# Altium PCB Inverter.PcbDoc
Units mm, origin at the board's own origin, x right, y up, seen from the top; angles counter-clockwise.
Board outline 152.4 x 101.6 mm, 2 copper layers (Top Layer, Bottom Layer); 61 components, 47 nets, 212 pads, 0 vias.
Unrouted connection lines stored in the file: 107.
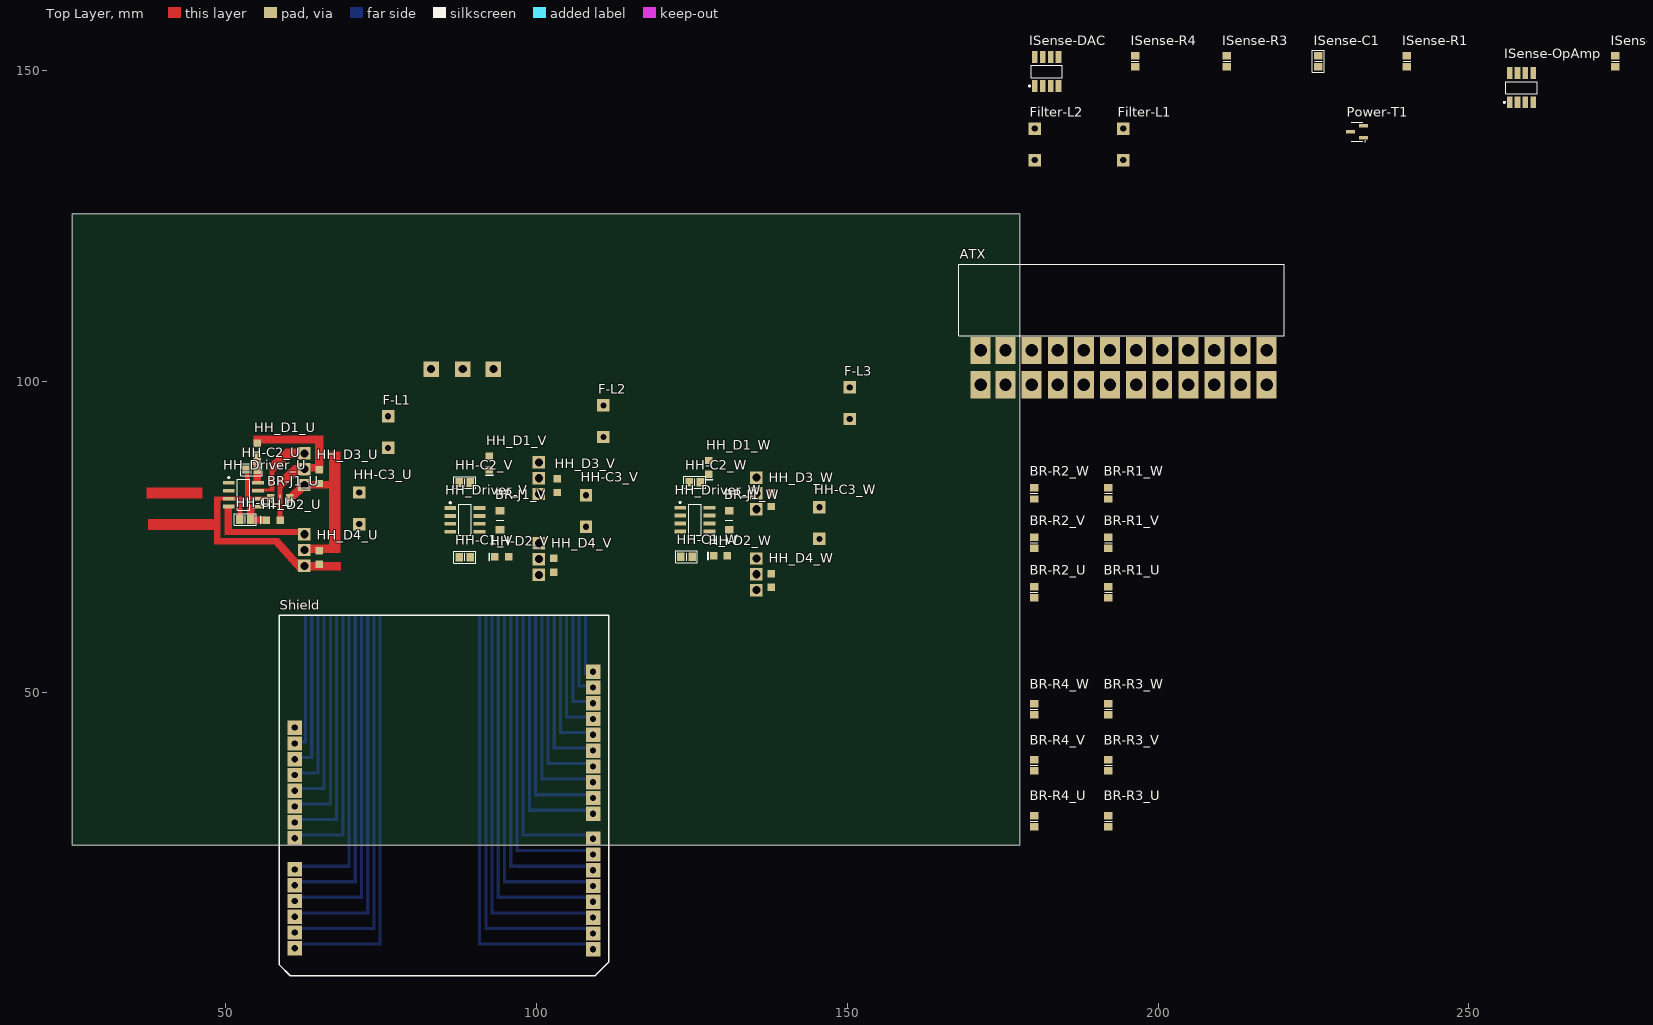
[diagram p0: Top Layer view]
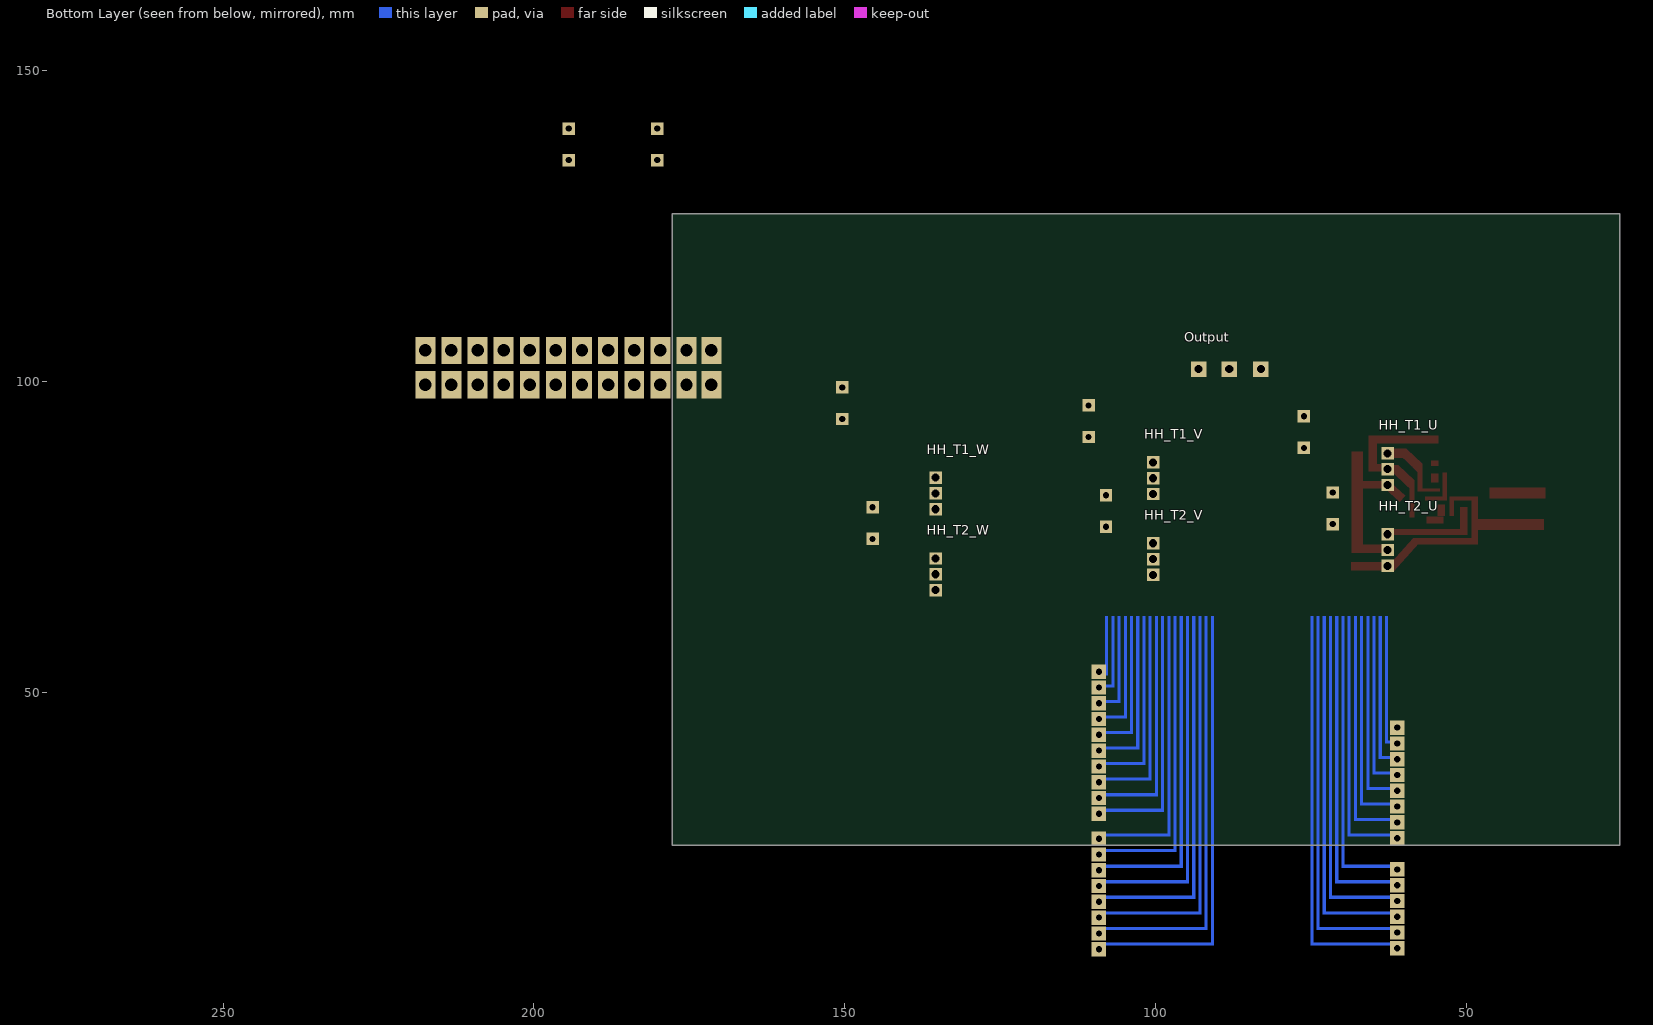
[diagram p1: Bottom Layer view, seen from below]

## Layer stack, top to bottom
Top Solder: solder mask 0.0102, Solder Resist, Dk 3.5
Top Layer: signal copper 0.0356
Dielectric 1: dielectric 0.32, FR-4, Dk 4.8
Bottom Layer: signal copper 0.0356
Bottom Solder: solder mask 0.0102, Solder Resist, Dk 3.5

## Board outline
25.4,25.4 177.8,25.4 177.8,127 25.4,127

## Design rules (kind name [scope] priority, off if disabled: settings)
Clearance [All] p1: gap=0.254
PolygonConnect [All] p1: connectstyle=Relief reliefconductorwidth=0.254 reliefentries=4 polygonreliefangle="90 Angle" airgapwidth=0.254
RoutingVias [All] p1: holewidth=0.711 width=1.27 viastyle="Through Hole" minholewidth=0.711 minwidth=1.27 maxholewidth=0.711 maxwidth=1.27
SolderMaskExpansion [All] p1: expansion=0.102
Width [All] p1: maxlimit=0.254 minlimit=0.254 preferedwidth=0.254
30 further rules are at their usual default settings.

## Classes and differential pairs
component class ISense: ISense-C1 ISense-DAC ISense-OpAmp ISense-R1 ISense-R2 ISense-R3 ISense-R4
component class ATX: ATX Filter-L1 Filter-L2 HV-PWM-T Power-T1
component class "Arduino Uno Connector": Shield
channel class Bridge: U V W
component class "Output Filter": F-L1 F-L2 F-L3
component class U: BR-J1_U BR-R1_U BR-R2_U BR-R3_U BR-R4_U HH-C1_U HH-C2_U HH-C3_U HH-D2_U HH_D1_U HH_D3_U HH_D4_U HH_Driver_U HH_T1_U HH_T2_U
component class V: BR-J1_V BR-R1_V BR-R2_V BR-R3_V BR-R4_V HH-C1_V HH-C2_V HH-C3_V HH-D2_V HH_D1_V HH_D3_V HH_D4_V HH_Driver_V HH_T1_V HH_T2_V
component class W: BR-J1_W BR-R1_W BR-R2_W BR-R3_W BR-R4_W HH-C1_W HH-C2_W HH-C3_W HH-D2_W HH_D1_W HH_D3_W HH_D4_W HH_Driver_W HH_T1_W HH_T2_W
component class Top: Output

## Components (designator, comment, footprint, x,y, rotation, side; value= is the part's Value field where it differs from the comment)
ATX "ATX sorted" ATX 217.475,105 r180 top
BR-J1_U "0R" "R 0805 / 2012 wide" 58.8,81.2 r0 top (schematic designator BR-J1)
BR-J1_V "0R" "R 0805 / 2012 wide" 94.175,77.675 r90 top (schematic designator BR-J1)
BR-J1_W "0R" "R 0805 / 2012 wide" 131.025,77.675 r90 top (schematic designator BR-J1)
BR-R1_U "10K" "R 0805 / 2012" 192.009,66.128 r90 top (schematic designator BR-R1)
BR-R1_V "10K" "R 0805 / 2012" 192.009,74.054 r90 top (schematic designator BR-R1)
BR-R1_W "10K" "R 0805 / 2012" 192.009,82.004 r90 top (schematic designator BR-R1)
BR-R2_U "10K" "R 0805 / 2012" 180.084,66.128 r90 top (schematic designator BR-R2)
BR-R2_V "10K" "R 0805 / 2012" 180.084,74.054 r90 top (schematic designator BR-R2)
BR-R2_W "10K" "R 0805 / 2012" 180.084,82.004 r90 top (schematic designator BR-R2)
BR-R3_U "33R" "R 0805 / 2012" 192.009,29.301 r90 top (schematic designator BR-R3)
BR-R3_V "33R" "R 0805 / 2012" 192.009,38.277 r90 top (schematic designator BR-R3)
BR-R3_W "33R" "R 0805 / 2012" 192.009,47.277 r90 top (schematic designator BR-R3)
BR-R4_U "33R" "R 0805 / 2012" 180.084,29.301 r90 top (schematic designator BR-R4)
BR-R4_V "33R" "R 0805 / 2012" 180.084,38.277 r90 top (schematic designator BR-R4)
BR-R4_W "33R" "R 0805 / 2012" 180.084,47.277 r90 top (schematic designator BR-R4)
F-L1 "10uH" "Header 1x2+1 1.0mm" 76.175,89.325 r90 top
F-L2 "10uH" "Header 1x2+1 1.0mm" 110.8,91.075 r90 top
F-L3 "10uH" "Header 1x2+1 1.0mm" 150.425,93.975 r90 top
Filter-L1 "10uH" "Header 1x2+1 1.0mm" 194.409,135.607 r90 top
Filter-L2 "10uH" "Header 1x2+1 1.0mm" 180.184,135.607 r90 top
HH-C1_U "10uF" "C 0805 / 2012" 53.2,77.8 r180 top (schematic designator HH-C1)
HH-C1_V "10uF" "C 0805 / 2012" 88.525,71.75 r180 top (schematic designator HH-C1)
HH-C1_W "10uF" "C 0805 / 2012" 124.175,71.8 r180 top (schematic designator HH-C1)
HH-C2_U "10uF" "C 0805 / 2012" 54.2,85.8 r180 top (schematic designator HH-C2)
HH-C2_V "10uF" "C 0805 / 2012" 88.525,83.75 r180 top (schematic designator HH-C2)
HH-C2_W "10uF" "C 0805 / 2012" 125.5,83.8 r180 top (schematic designator HH-C2)
HH-C3_U "10uF" "Header 1x2+1 1.0mm" 71.525,82.15 r270 top (schematic designator HH-C3)
HH-C3_V "10uF" "Header 1x2+1 1.0mm" 108,81.725 r270 top (schematic designator HH-C3)
HH-C3_W "10uF" "Header 1x2+1 1.0mm" 145.55,79.775 r270 top (schematic designator HH-C3)
HH-D2_U "SK14" SC-90 57.7,77.7 r180 top (schematic designator HH-D2)
HH-D2_V "SK14" SC-90 94.45,71.8 r180 top (schematic designator HH-D2)
HH-D2_W "SK14" SC-90 129.625,71.95 r180 top (schematic designator HH-D2)
HH_D1_U "SK14" SC-90 55.125,89 r270 top (schematic designator HH_D1)
HH_D1_V "SK14" SC-90 92.475,86.9 r270 top (schematic designator HH_D1)
HH_D1_W "SK14" SC-90 127.8,86.2 r270 top (schematic designator HH_D1)
HH_D3_U "SK14" SC-90 65.1,84.7 r90 top (schematic designator HH_D3)
HH_D3_V "SK14" SC-90 103.375,83.25 r90 top (schematic designator HH_D3)
HH_D3_W "SK14" SC-90 137.8,81 r90 top (schematic designator HH_D3)
HH_D4_U "SK14" SC-90 65.1,71.7 r90 top (schematic designator HH_D4)
HH_D4_V "SK14" SC-90 102.825,70.45 r90 top (schematic designator HH_D4)
HH_D4_W "SK14" SC-90 137.8,68 r90 top (schematic designator HH_D4)
HH_Driver_U "IR2101S" SOIC-8#1 52.9,81.8 r0 top (schematic designator HH_Driver)
HH_Driver_V "IR2101S" SOIC-8#1 88.525,77.75 r0 top (schematic designator HH_Driver)
HH_Driver_W "IR2101S" SOIC-8#1 125.5,77.8 r0 top (schematic designator HH_Driver)
HH_T1_U "BUZ21" "TO-220 AB" 62.7,85.9 r270 bottom (schematic designator HH_T1)
HH_T1_V "BUZ21" "TO-220 AB" 100.425,84.45 r270 bottom (schematic designator HH_T1)
HH_T1_W "BUZ21" "TO-220 AB" 135.4,82 r270 bottom (schematic designator HH_T1)
HH_T2_U "BUZ21" "TO-220 AB" 62.7,72.9 r270 bottom (schematic designator HH_T2)
HH_T2_V "BUZ21" "TO-220 AB" 100.425,71.45 r270 bottom (schematic designator HH_T2)
HH_T2_W "BUZ21" "TO-220 AB" 135.4,69 r270 bottom (schematic designator HH_T2)
ISense-C1 "100nF" "C 0805 / 2012" 225.786,151.507 r90 top
ISense-DAC "TC1321" SOIC-8#2 182.084,149.857 r90 top
ISense-OpAmp "LM258" SOIC-8#2 258.45,147.25 r90 top
ISense-R1 "0.47R" "R 0805 / 2012" 240.012,151.507 r90 top
ISense-R2 "10k" "R 0805 / 2012" 273.538,151.507 r90 top
ISense-R3 "10k" "R 0805 / 2012" 211.06,151.507 r90 top
ISense-R4 "10k" "R 0805 / 2012" 196.335,151.507 r90 top
Output "Screw terminals" DG301-5.0-03 83.1,102 r0 bottom
Power-T1 "2N7000" SOT-23-3 231.986,140.157 r90 top
Shield "Arduino Uno" "Arduino Uno Adapter" 85.15,34.8 r270 top

## Footprints (in the part's own frame and the unit in brackets; to place one, negate y for a bottom-side part, rotate by r counter-clockwise, add the part's x,y. Pads: shape width x height; smd on the part's side, far side on the other; paste and mask are expansions set on the pad)
"Arduino Uno Adapter" [mm]
  rect 2.3x2.3 hole 1: 0(26.1,24) 1(23.56,24) 2(21.02,24) 3(18.48,24) 3V3(-1.92,-24) 4(15.94,24) 5(13.4,24) 5V(0.62,-24) 6(10.86,24) 7(8.32,24) 8(4.32,24) 9(1.78,24) 10(-0.76,24) 11(-3.3,24) 12(-5.84,24) 13(-8.38,24) A0(13.26,-24) A1(15.8,-24) A2(18.34,-24) A3(20.88,-24) A4(23.42,-24) A5(25.96,-24) AREF(-13.46,24) GND1(3.16,-24) GND2(5.7,-24) GND3(-10.92,24) IOREF(-7,-24) NC(-9.54,-24) RESET(-4.46,-24) SCL(-18.54,24) SDA(-16,24) Vin(8.24,-24)
  Bottom Layer region: 10,11.5 10.5,11.5 10.5,24 10,24
  Bottom Layer region: 12.5,10.5 13,10.5 13,24 12.5,24
  Bottom Layer region: 15,9.5 15.5,9.5 15.5,24 15,24
  Bottom Layer region: 17.5,8.5 18,8.5 18,24 17.5,24
  Bottom Layer region: 20,7.5 20.5,7.5 20.5,24 20,24
  Bottom Layer region: 22.5,6.5 23,6.5 23,24 22.5,24
  Bottom Layer region: 25,5.5 25.5,5.5 25.5,24 25,24
  Bottom Layer region: 25,-24 25.5,-24 25.5,-10 25,-10
  Bottom Layer region: 22.5,-24 23,-24 23,-11 22.5,-11
  Bottom Layer region: 20,-24 20.5,-24 20.5,-12 20,-12
  Bottom Layer region: -7.5,-23.5 -7,-23.5 -7,-22 -7.5,-22
  Bottom Layer region: -27.5,-22.5 -7,-22.5 -7,-22 -27.5,-22
  Bottom Layer region: -27.5,-21.5 -4.5,-21.5 -4.5,-21 -27.5,-21
  Bottom Layer region: -27.5,-20.5 -2,-20.5 -2,-20 -27.5,-20
  Bottom Layer region: -27.5,-19.5 0.5,-19.5 0.5,-19 -27.5,-19
  Bottom Layer region: -27.5,-18.5 3,-18.5 3,-18 -27.5,-18
  Bottom Layer region: -27.5,-17.5 5.5,-17.5 5.5,-17 -27.5,-17
  Bottom Layer region: -27.5,-16.5 8,-16.5 8,-16 -27.5,-16
  Bottom Layer region: -27.5,-15.5 13,-15.5 13,-15 -27.5,-15
  Bottom Layer region: -27.5,-14.5 15.5,-14.5 15.5,-14 -27.5,-14
  Bottom Layer region: -27.5,-13.5 18,-13.5 18,-13 -27.5,-13
  Bottom Layer region: -27.5,-12.5 20.5,-12.5 20.5,-12 -27.5,-12
  Bottom Layer region: -27.5,-11.5 23,-11.5 23,-11 -27.5,-11
  Bottom Layer region: -27.5,-10.5 25.5,-10.5 25.5,-10 -27.5,-10
  Bottom Layer region: -5,-23.5 -4.5,-23.5 -4.5,-21 -5,-21
  Bottom Layer region: -2.5,-23.5 -2,-23.5 -2,-20 -2.5,-20
  Bottom Layer region: 0,-23.5 0.5,-23.5 0.5,-19 0,-19
  Bottom Layer region: 2.5,-23.5 3,-23.5 3,-18 2.5,-18
  Bottom Layer region: 5,-23.5 5.5,-23.5 5.5,-17 5,-17
  Bottom Layer region: 7.5,-23.5 8,-23.5 8,-16 7.5,-16
  Bottom Layer region: 12.5,-23.5 13,-23.5 13,-15 12.5,-15
  Bottom Layer region: 15,-23.5 15.5,-23.5 15.5,-14 15,-14
  Bottom Layer region: 17.5,-23.5 18,-23.5 18,-13 17.5,-13
  Bottom Layer region: 7.5,12.5 8,12.5 8,24 7.5,24
  Bottom Layer region: 3.5,13.5 4,13.5 4,24 3.5,24
  Bottom Layer region: 1,14.5 1.5,14.5 1.5,24 1,24
  Bottom Layer region: -1.5,15.5 -1,15.5 -1,24 -1.5,24
  Bottom Layer region: -4,16.5 -3.5,16.5 -3.5,24 -4,24
  Bottom Layer region: -6.5,17.5 -6,17.5 -6,24 -6.5,24
  Bottom Layer region: -9,18.5 -8.5,18.5 -8.5,24 -9,24
  Bottom Layer region: -11.5,19.5 -11,19.5 -11,24 -11.5,24
  Bottom Layer region: -14,20.5 -13.5,20.5 -13.5,24 -14,24
  Bottom Layer region: -27.5,9.5 15.5,9.5 15.5,10 -27.5,10
  Bottom Layer region: -27.5,8.5 18,8.5 18,9 -27.5,9
  Bottom Layer region: -27.5,7.5 20.5,7.5 20.5,8 -27.5,8
  Bottom Layer region: -27.5,6.5 23,6.5 23,7 -27.5,7
  Bottom Layer region: -27.5,5.5 25.5,5.5 25.5,6 -27.5,6
  Bottom Layer region: -27.5,10.5 13,10.5 13,11 -27.5,11
  Bottom Layer region: -27.5,11.5 10.5,11.5 10.5,12 -27.5,12
  Bottom Layer region: -27.5,12.5 8,12.5 8,13 -27.5,13
  Bottom Layer region: -27.5,13.5 4,13.5 4,14 -27.5,14
  Bottom Layer region: -27.5,14.5 1.5,14.5 1.5,15 -27.5,15
  Bottom Layer region: -27.5,15.5 -1,15.5 -1,16 -27.5,16
  Bottom Layer region: -27.5,16.5 -3.5,16.5 -3.5,17 -27.5,17
  Bottom Layer region: -27.5,17.5 -6,17.5 -6,18 -27.5,18
  Bottom Layer region: -27.5,18.5 -8.5,18.5 -8.5,19 -27.5,19
  Bottom Layer region: -27.5,19.5 -11,19.5 -11,20 -27.5,20
  Bottom Layer region: -27.5,20.5 -13.5,20.5 -13.5,21 -27.5,21
  Bottom Layer region: -27.5,22.5 -17.9,22.5 -17.9,23 -27.5,23
  Bottom Layer region: -27.5,21.5 -16,21.5 -16,22 -27.5,22
  Bottom Layer region: -16.5,21.5 -16,21.5 -16,24 -16.5,24
  silkscreen extent -27.64,-26.5 30.36,26.5
ATX [mm] "Molex MINI-FIT JR. 24-polig"
  rect 3.2x4.4 hole 2 paste+0: 1(46,0) 2(42,0) 3(37.8,0) 4(33.6,0) 5(29.4,0) 6(25.2,0) 7(21,0) 8(16.8,0) 9(12.6,0) 10(8.4,0) 11(4.2,0) 12(0,0) 13(46,5.5) 14(42,5.5) 15(37.8,5.5) 16(33.6,5.5) 17(29.4,5.5) 18(25.2,5.5) 19(21,5.5) 20(16.8,5.5) 21(12.6,5.5) 22(8.4,5.5) 23(4.2,5.5) 24(0,5.5)
  silkscreen extent -2.79,-13.9 49.5,-2.34, body extent -2.63,-13.97 49.37,5.96, height 12.4
"C 0805 / 2012" [mm] "Capacitor 0805 / 2012 (2.0 x 1.2 mm)"
  rect 1.2x1.4 smd: 1(-0.9,0) 2(0.9,0)
  silkscreen extent -1.75,-0.95 1.75,0.95, body extent -1,-0.62 1,0.62, height 0.78
DG301-5.0-03 [mm]
  rect 2.5x2.5 hole 1.3: 1(0,0) 2(5.08,0) 3(10,0)
  body extent -3.05,-3.1 12.55,4.5, height 10
"Header 1x2+1 1.0mm" [mm] "2.54mm"
  rect 2x2 hole 1: 1(0,0) 2(5.08,0)
"R 0805 / 2012" [mm] "Resistor 0805 / 2012 (2.0 x 1.2 mm)"
  rect 1.2x1.4 smd: 1(-0.9,0) 2(0.9,0)
  silkscreen extent 0,-0.6 0,0.6, body extent -1,-0.62 1,0.62, height 0.45
"R 0805 / 2012 wide" [mm] "Resistor 0805 / 2012 (2.0 x 1.2 mm)"
  rect 1.2x1.4 smd: 1(-1.524,0) 2(1.524,0)
  silkscreen extent 0,-0.6 0,0.6, body extent -1,-0.62 1,0.62, height 0.45
SC-90 [mm]
  rect 1.2x1.2 smd: 1(1.1,-0.025) 2(-1.1,-0.025)
  silkscreen extent 2,-0.6 2,0.6, body extent -1.35,-0.7 1.35,0.65, height 0.85
SOIC-8#1 [mm] "SOIC, 8-Leads, Body 4.9x3.9mm, Pitch 1.27mm, IPC High Density"
  rect 1.9x0.6 smd: 1(-2.35,1.905) 2(-2.35,0.635) 3(-2.35,-0.635) 4(-2.35,-1.905) 5(2.35,-1.905) 6(2.35,-0.635) 7(2.35,0.635) 8(2.35,1.905)
  silkscreen extent -2.47,-2.5 1,2.88, body extent -3,-2.45 3,2.45, height 1.75
SOIC-8#2 [mm]
  rect 1.9x0.9 smd: 1(-2.35,1.905) 2(-2.35,0.635) 3(-2.35,-0.635) 4(-2.35,-1.905) 5(2.35,-1.905) 6(2.35,-0.635) 7(2.35,0.635) 8(2.35,1.905)
  silkscreen extent -2.47,-2.5 1,2.88, body extent -3,-2.45 3,2.45, height 1.75
SOT-23-3 [mm]
  rect 0.55x1.45 smd: 1(-0.95,-1.075) 2(0.965,-1.067) 3(0,1.067)
  silkscreen extent -1.57,-1.35 1.55,0.9, body extent -1.49,-1.32 1.51,1.28, height 1.1
"TO-220 AB" [mm]
  rect 2x2 hole 1.3: 1(-2.54,0) 2(0,0) 3(2.54,0)
  body extent -5.32,-1.7 5.33,3.1, height 21.5

## Part data
BR-J1_U BR-J1_V BR-J1_W BR-R1_U BR-R1_V BR-R1_W BR-R2_U BR-R2_V BR-R2_W BR-R3_U BR-R3_V BR-R3_W BR-R4_U BR-R4_V BR-R4_W ISense-R1 ISense-R2 ISense-R3 ISense-R4: library part Resistor
F-L1 F-L2 F-L3 Filter-L1 Filter-L2: library part Coil
HH-C1_U HH-C1_V HH-C1_W HH-C2_U HH-C2_V HH-C2_W HH-C3_U HH-C3_V HH-C3_W ISense-C1: library part Capacitor
HH-D2_U HH-D2_V HH-D2_W HH_D1_U HH_D1_V HH_D1_W HH_D3_U HH_D3_V HH_D3_W HH_D4_U HH_D4_V HH_D4_W: library part Diode
HH_Driver_U HH_Driver_V HH_Driver_W: library part IR21xx, "High and Low Side Driver"
HH_T1_U HH_T1_V HH_T1_W HH_T2_U HH_T2_V HH_T2_W: library part "FET N-Channel", "Enhancement Type"
ISense-DAC: "DAC 10-Bit Two-Wire"
ISense-OpAmp: "Dual OpAmp"
Output: library part "Header 1x3"
Power-T1: "N-FET"

## Nets (pads, with @x,y where several pads share a name; then routed paths per layer and width w, separated by ;. In a path a pad name is that pad's centre, name@x,y a point inside that pad or via, vN(x,y) a via of type N, cw(c..) or ccw(c..) an arc to the next point about the centre after c; other vN are vias at no path point)
3V3: ATX.1 ATX.2 ATX.12 ATX.13
5V: ATX.4 ATX.6 ATX.21 ATX.22 ATX.23
BOOTSTRAP-SOURCE_U: BR-J1_U.1 HH-C2_U.2 HH_Driver_U.6
BOOTSTRAP-SOURCE_V: BR-J1_V.1 HH-C2_V.2 HH_Driver_V.6
BOOTSTRAP-SOURCE_W: BR-J1_W.1 HH-C2_W.2 HH_Driver_W.6
BOOTSTRAP_U: HH-C2_U.1 HH_D1_U.1 HH_Driver_U.8
BOOTSTRAP_V: HH-C2_V.1 HH_D1_V.1 HH_Driver_V.8
BOOTSTRAP_W: HH-C2_W.1 HH_D1_W.1 HH_Driver_W.8
GND: BR-R1_U.1 BR-R1_V.1 BR-R1_W.1 BR-R2_U.1 BR-R2_V.1 BR-R2_W.1 Filter-L2.2 HH-C1_U.2 HH-C1_V.2 HH-C1_W.2 HH_Driver_U.3 HH_Driver_V.3 HH_Driver_W.3 ISense-DAC.4 ISense-OpAmp.4
H_IN_U: BR-R1_U.2 HH_Driver_U.1
H_IN_V: BR-R1_V.2 HH_Driver_V.1
H_IN_W: BR-R1_W.2 HH_Driver_W.1
H_OUT_U: BR-R3_U.1 HH_Driver_U.7
H_OUT_V: BR-R3_V.1 HH_Driver_V.7
H_OUT_W: BR-R3_W.1 HH_Driver_W.7
HV+: HH-C3_U.1 HH-C3_V.1 HH-C3_W.1 HH-D2_U.2 HH-D2_V.2 HH-D2_W.2 HH_D1_U.2 HH_D1_V.2 HH_D1_W.2 HH_D3_U.1 HH_D3_V.1 HH_D3_W.1 HH_Driver_U.5 HH_Driver_V.5 HH_Driver_W.5 HH_T1_U.2 HH_T1_V.2 HH_T1_W.2 ISense-R1.1 ISense-R3.1
HV-: HH-C3_U.2 HH-C3_V.2 HH-C3_W.2 HH_D4_U.2 HH_D4_V.2 HH_D4_W.2 HH_T2_U.3 HH_T2_V.3 HH_T2_W.3
L_IN_U: BR-R2_U.2 HH_Driver_U.2
L_IN_V: BR-R2_V.2 HH_Driver_V.2
L_IN_W: BR-R2_W.2 HH_Driver_W.2
L_OUT_U: BR-R4_U.1 HH_Driver_U.4
L_OUT_V: BR-R4_V.1 HH_Driver_V.4
L_OUT_W: BR-R4_W.1 HH_Driver_W.4
NetATX_3: ATX.3 ATX.5 ATX.7 ATX.15 ATX.17 ATX.18 ATX.19 ATX.24 Filter-L2.1
NetATX_10: ATX.10 ATX.11 Filter-L1.1
NetF-C1_1: F-L1.2 Output.1
NetF-C1_2: F-L2.2 Output.2
NetF-C2_2: F-L3.2 Output.3
NetFilter-L1_2: Filter-L1.2 ISense-R1.2 ISense-R2.1
NetHH-C1_U_1: HH-C1_U.1 HH-D2_U.1
NetHH-C1_V_1: HH-C1_V.1 HH-D2_V.1
NetHH-C1_W_1: HH-C1_W.1 HH-D2_W.1
NetHV-PWM-T_G: 
NetISense-C1_1: ISense-C1.1 ISense-OpAmp.3 ISense-R2.2
NetISense-C1_2: ISense-C1.2 ISense-OpAmp.2 ISense-R3.2 ISense-R4.1
NetISense-DAC_7: ISense-DAC.7 ISense-OpAmp.6
NetISense-OpAmp_1: ISense-OpAmp.1 ISense-OpAmp.5 ISense-R4.2
NetISense-OpAmp_7: ISense-OpAmp.7
OUTPUT_U: BR-J1_U.2 F-L1.1 HH_D3_U.2 HH_D4_U.1 HH_T1_U.3 HH_T2_U.2
OUTPUT_V: BR-J1_V.2 F-L2.1 HH_D3_V.2 HH_D4_V.1 HH_T1_V.3 HH_T2_V.2
OUTPUT_W: BR-J1_W.2 F-L3.1 HH_D3_W.2 HH_D4_W.1 HH_T1_W.3 HH_T2_W.2
T1_G_U: BR-R3_U.2 HH_T1_U.1
T1_G_V: BR-R3_V.2 HH_T1_V.1
T1_G_W: BR-R3_W.2 HH_T1_W.1
T2_G_U: BR-R4_U.2 HH_T2_U.1
T2_G_V: BR-R4_V.2 HH_T2_V.1
T2_G_W: BR-R4_W.2 HH_T2_W.1
pads on no net: ATX.8 ATX.9 ATX.14 ATX.16 ATX.20 ISense-DAC.1 ISense-DAC.2 ISense-DAC.3 ISense-DAC.5 ISense-DAC.6 ISense-DAC.8 ISense-OpAmp.8 Power-T1.1 Power-T1.2 Power-T1.3 Shield.0 Shield.1 Shield.2 Shield.3 Shield.3V3 Shield.4 Shield.5 Shield.5V Shield.6 Shield.7 Shield.8 Shield.9 Shield.10 Shield.11 Shield.12 Shield.13 Shield.A0 Shield.A1 Shield.A2 Shield.A3 Shield.A4 Shield.A5 Shield.AREF Shield.GND1 Shield.GND2 Shield.GND3 Shield.IOREF Shield.NC Shield.RESET Shield.SCL Shield.SDA Shield.Vin

## Other copper
Top Layer:
  rectangle net HV+: 64.4,86.3 65.8,91.3
  rectangle net NetHH-C1_U_1: 53.7,77.2 56.5,78.3
  rectangle net OUTPUT_U: 66.65,72.425 68.55,88.775
  region net H_OUT_U: 58.136,85.665 60.706,88.118 59.67,89.203 57.1,86.75
  rectangle net H_OUT_U: 59.67,87.7 62,89.2
  rectangle net H_OUT_U: 57.1,85.65 58.1,86.75
  region net H_OUT_U: 57.6,85.15 58.735,86.234 58.36,86.627 57.224,85.544
  region net HV+: 58.9,82.5 60.035,83.584 59.66,83.977 58.524,82.894
  rectangle net HV+: 58.4,83 59.4,84.1
  rectangle net HV+: 60.97,85.468 62.006,86.553
  region net HV+: 59.436,83.015 62.006,85.468 60.97,86.553 58.4,84.1
  rectangle net HV+: 53.5,78.4 54.7,80.2
  region net OUTPUT_U: 60.757,80.595 63.148,82.721 62.21,83.776 59.819,81.65
  rectangle net GND: 63.1,69.6 68.6,71
  rectangle net OUTPUT_U: 63,72.4 67.15,73.8
  rectangle net OUTPUT_U: 63.5,82.8 66.85,84
  rectangle net HV+: 63.7,85.5 65.775,86.7
  region net GND: 61.798,69.369 62.741,70.216 58.584,74.835 57.641,73.987
  rectangle net GND: 49.2,73.8 58.6,74.8
  rectangle net GND: 48.2,73.8 49.2,80.9
  rectangle net L_OUT_U: 49.9,75.3 62.1,76.3
  rectangle net L_OUT_U: 49.9,76.3 51.1,79.8
  rectangle net GND: 52,78.4 52.8,81.5
  rectangle net GND: 48.2,80.9 52.3,81.5
  rectangle net HV+: 58.4,78.1 59.2,83
  rectangle net H_OUT_U: 54.3,82.3 57.9,82.8
  rectangle net H_OUT_U: 57.1,82.3 57.9,85.7
  rectangle net BOOTSTRAP-SOURCE_U: 53.2,80.9 56.7,81.5
  rectangle net BOOTSTRAP-SOURCE_U: 53.2,81.5 53.9,85.4
  rectangle net BOOTSTRAP_U: 54.5,83.8 55.7,85.2
  rectangle net HV+: 54.5,90 64.4,91.3
  rectangle net BOOTSTRAP_U: 54.5,86.45 55.7,87.3
  rectangle net GND: 37.525,76.1 48.55,77.925
  rectangle: 37.3,81.15 46.3,82.975